# Altium PCB PCB1.1.PcbDoc
Units mil, origin at the board's own origin, x right, y up, seen from the top; angles counter-clockwise.
Board outline 2362.2 x 2362.2 mil, 2 copper layers (Top Layer, Bottom Layer); 150 components, 103 nets, 538 pads, 1 vias.
Unrouted connection lines stored in the file: 224.
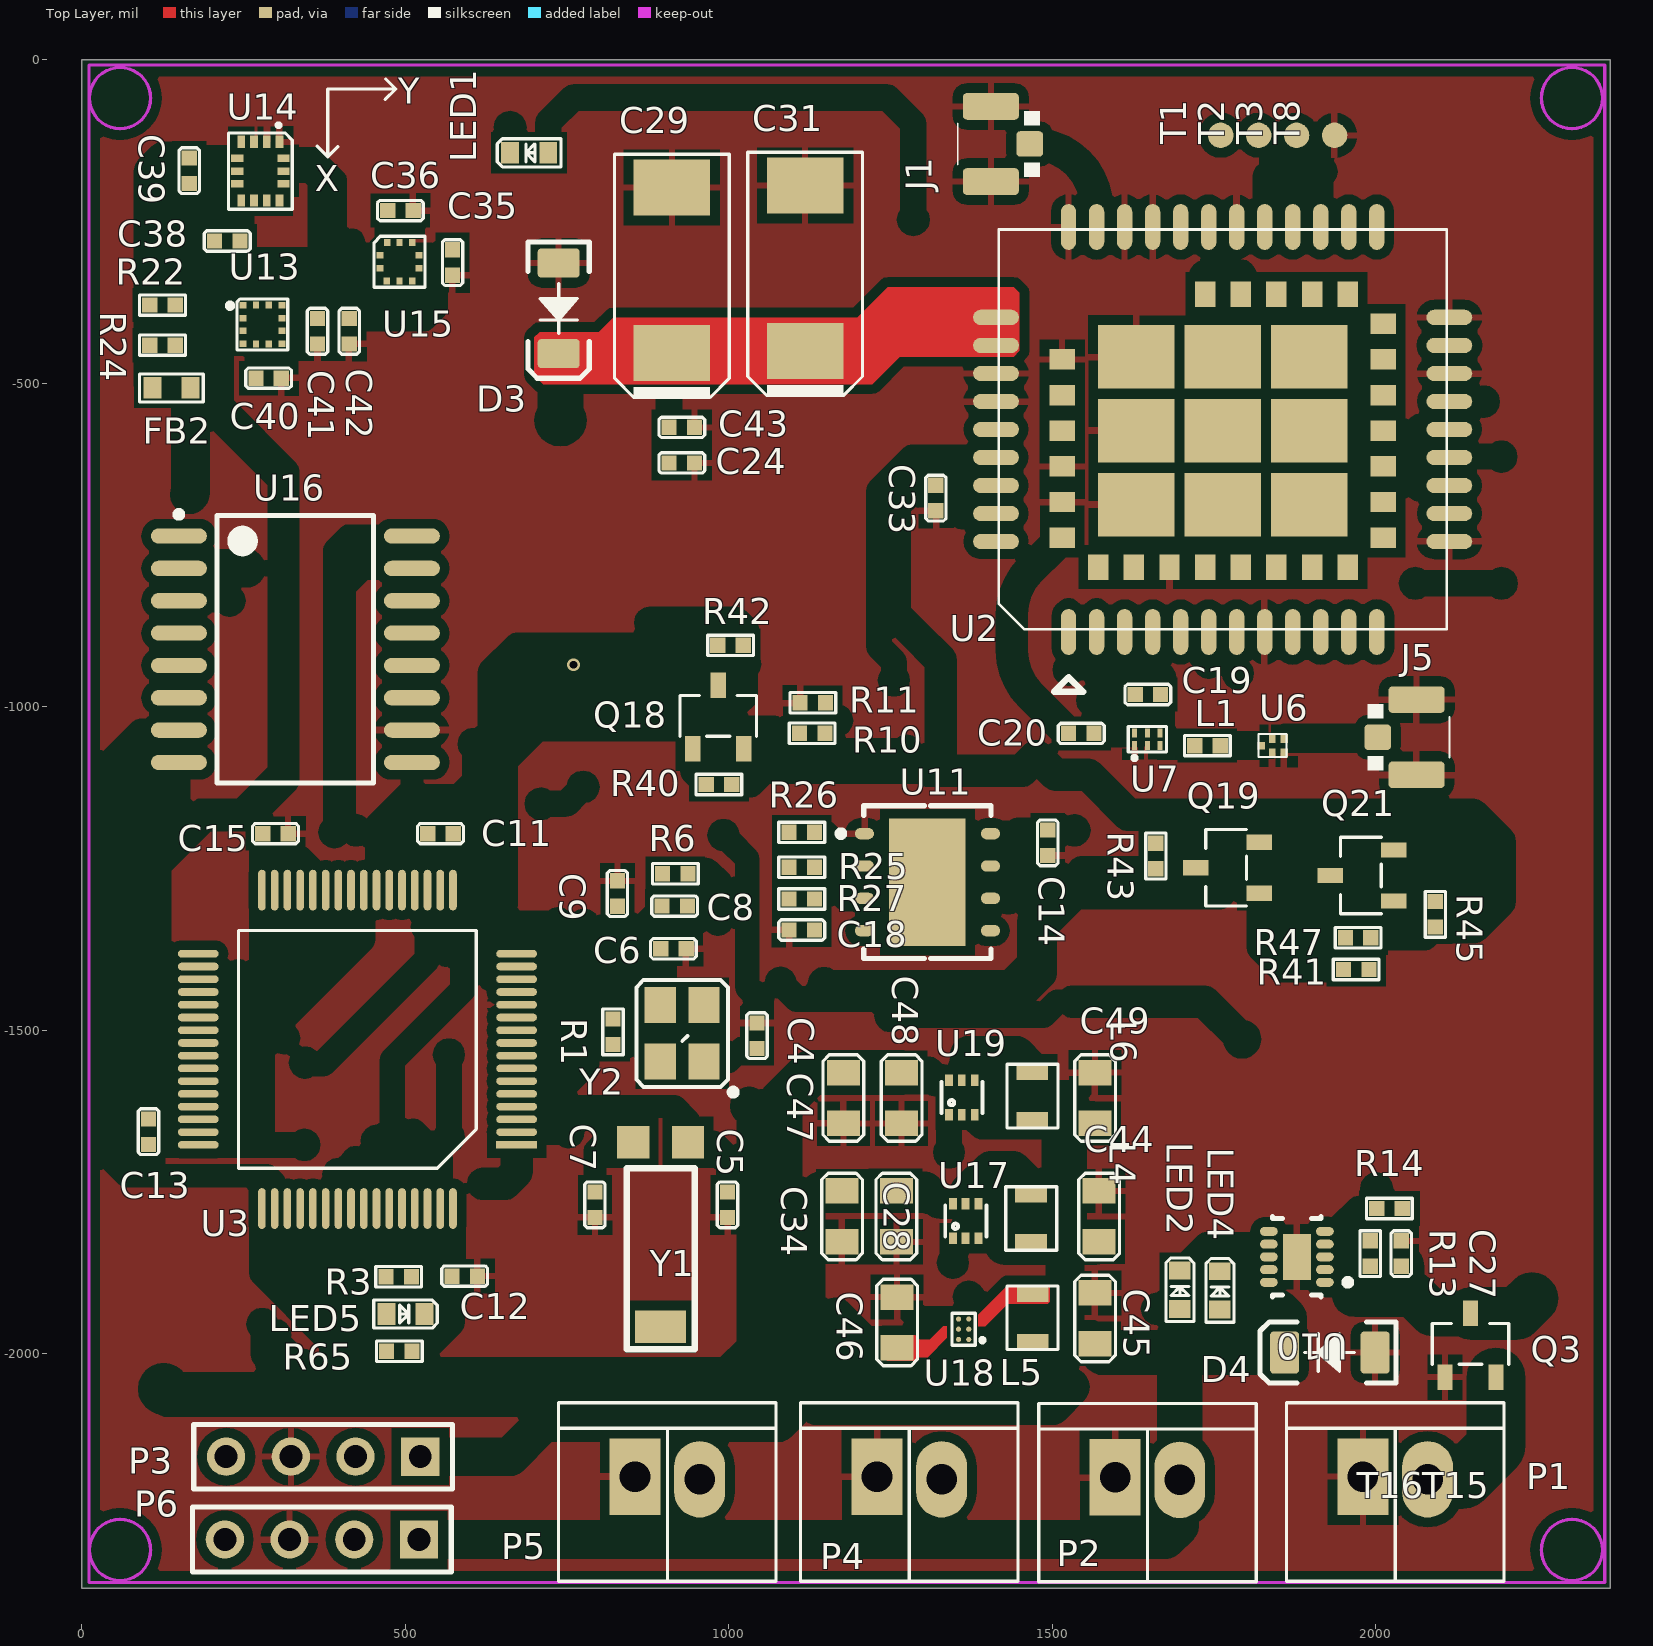
[diagram p0: Top Layer view]
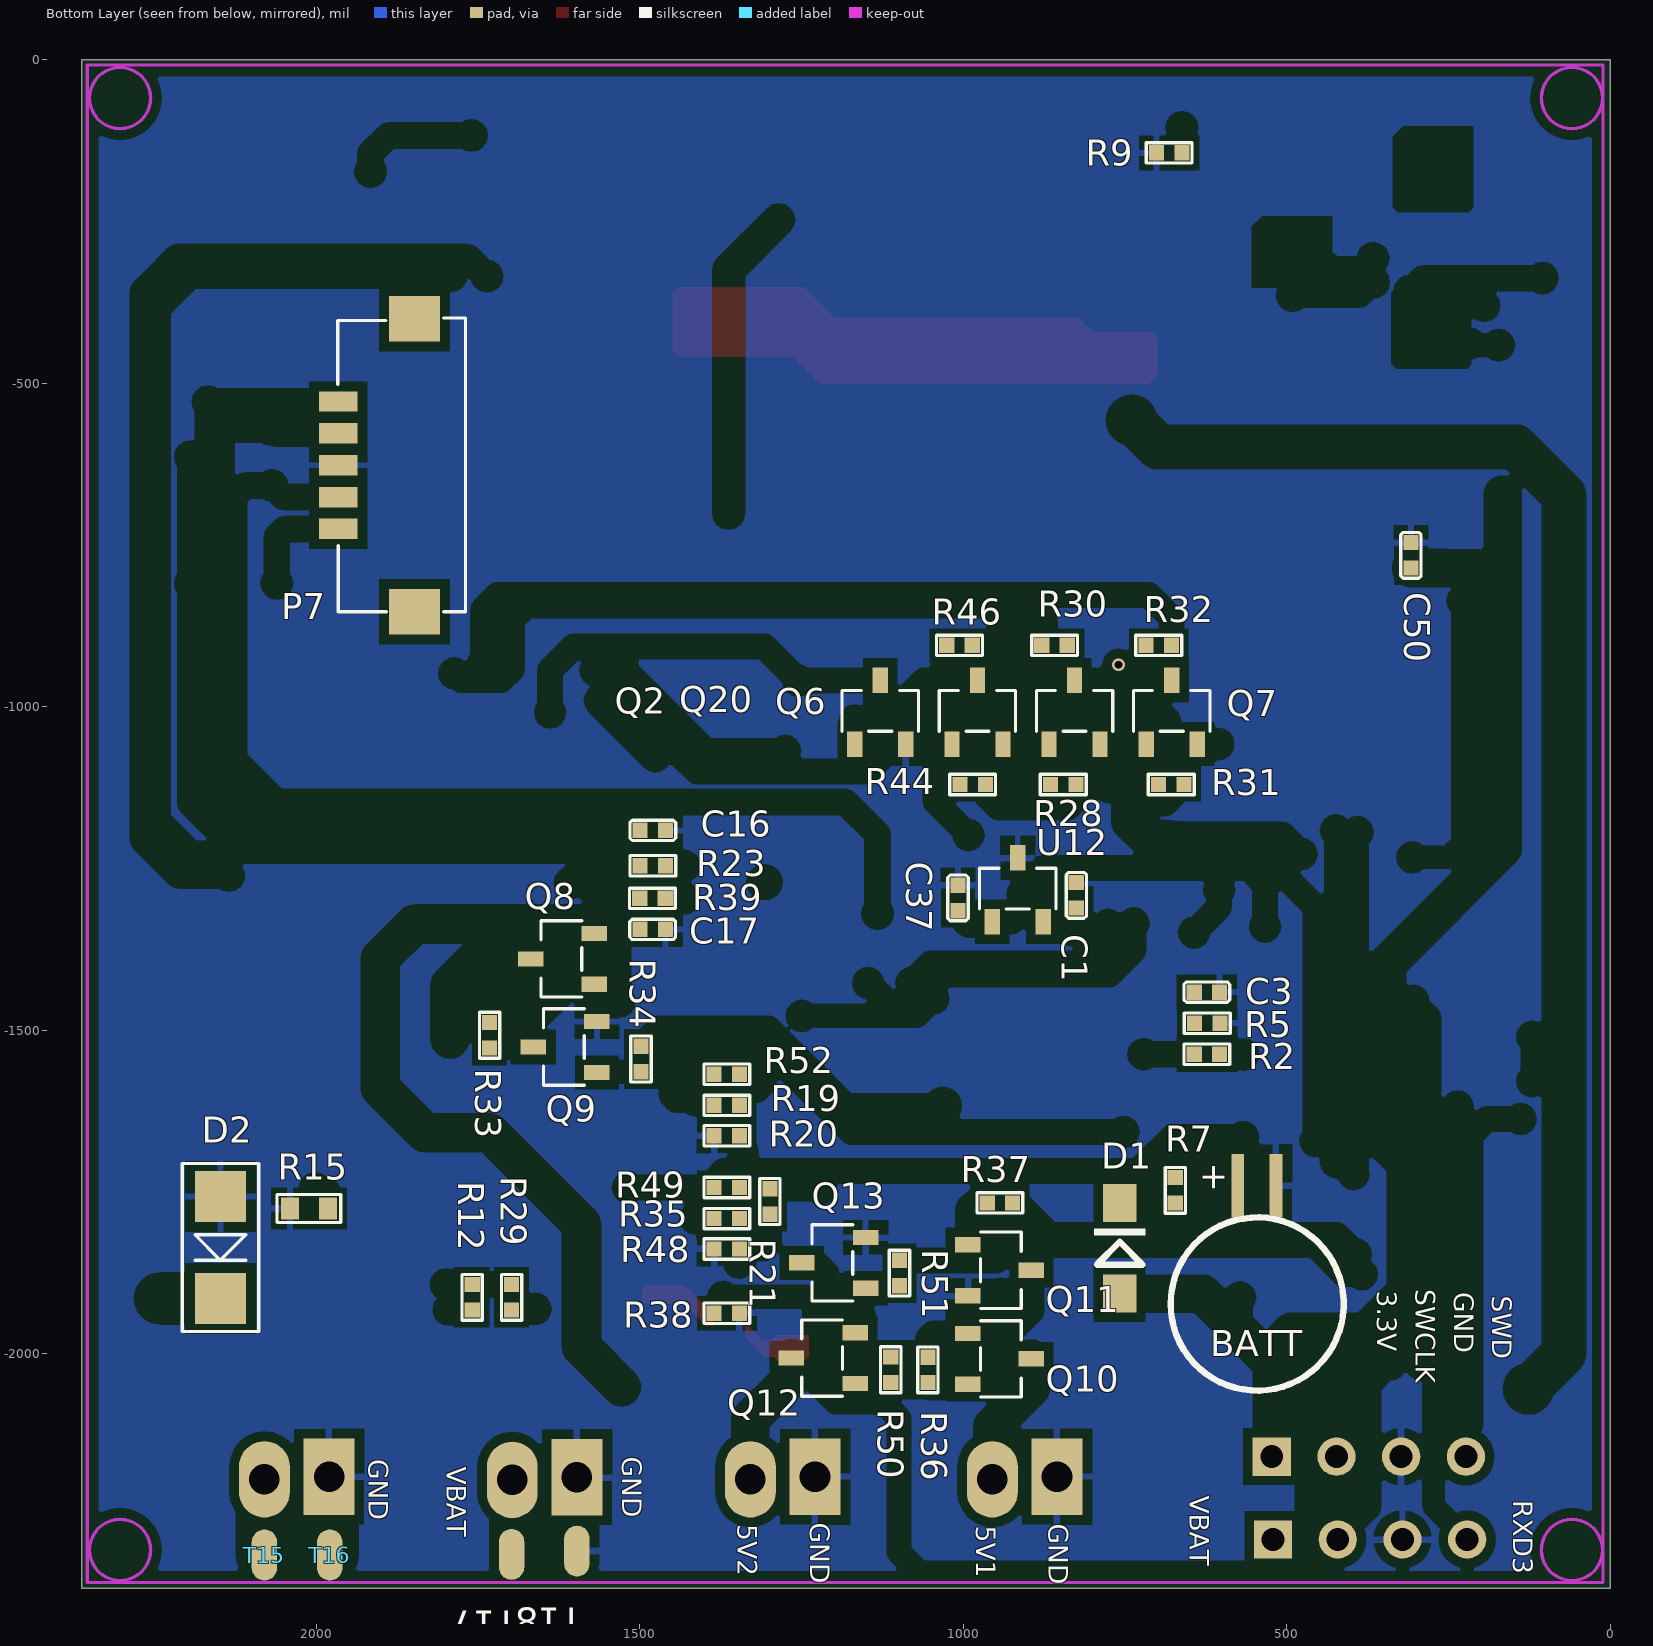
[diagram p1: Bottom Layer view, seen from below]

## Layer stack, top to bottom
Top Layer: signal copper 1.4
Dielectric: dielectric 12.6, FR-4, Dk 4.8
Bottom Layer: signal copper 1.4

## Board outline
0,-2362.2 0,0 2362.2,0 2362.2,-2362.2

## Design rules (kind name [scope] priority, off if disabled: settings)
Clearance [InPolygon  And InNet(AGND)] p1: gap=15
Clearance Clearance_1 [All] p2: gap=5
HoleToHoleClearance [All] p1: gap=5 allowstackedmicrovias=TRUE
MinimumSolderMaskSliver [All] p1: minsoldermaskwidth=1
PolygonConnect PolygonConnect_1 [IsVia  And InNet(AGND)] p1: connectstyle=Direct reliefconductorwidth=10 reliefentries=4 polygonreliefangle="90 Angle"
PolygonConnect [All] p2: connectstyle=Relief reliefconductorwidth=10 reliefentries=4 polygonreliefangle="90 Angle"
RoutingVias [All] p1: holewidth=28 width=50 viastyle="Through Hole" minholewidth=28 minwidth=50 maxholewidth=28 maxwidth=50
SilkToSilkClearance [All] p1: silktosilkclearance=5
SilkscreenOverComponentPads [All] p1: minsilkscreentomaskgap=1
SolderMaskExpansion [All] p1: expansion=4
Width [All] p1: maxlimit=200 minlimit=5 preferedwidth=10
24 further rules are at their usual default settings.

## Classes and differential pairs
component class sensors: C35 C36 C38 C39 C40 C41 C42 FB2 R22 R24 U13 U14 U15
component class power: C1 C27 C28 C34 C37 C44 C45 C46 C47 C48 C49 D2 D4 L4 L5 L6 LED2 LED4 P1 P2 P4 P5 Q3 Q8 Q9 Q10 Q11 Q12 Q13 R12 R13 R14 R15 R19 R20 R21 R29 R33 R34 R35 R36 R37 R38 R48 R49 R50 R51 R52 T15 T16 T17 T18 U10 U12 U17 U18 U19
component class GPS&&lte2: C10 C14 C16 C17 C18 C19 C20 C21 C24 C26 C29 C30 C31 C33 C43 D3 J1 J5 L1 LED1 P7 Q2 Q6 Q7 Q18 Q19 Q20 Q21 R8 R9 R10 R11 R17 R23 R25 R26 R27 R28 R30 R31 R32 R39 R40 R41 R42 R43 R44 R45 R46 R47 T1 T2 T3 T8 U6 U7 U11
component class CPU: BATT C3 C4 C5 C6 C7 C8 C9 C11 C12 C13 C15 C50 D1 LED5 P3 P6 R1 R2 R3 R5 R6 R7 R65 U3 U16 U? Y1 Y2
component class NBIOT: U2

## Components (designator, comment, footprint, x,y, rotation, side; value= is the part's Value field where it differs from the comment)
BATT "MS621FE" MS621FE 546,-1740 r90 bottom
C1 "0.1uF/25V" 0402c 825,-1311 r90 bottom
C3 "0.1uF/25v" 0402c 643,-1441 r180 bottom
C4 "22pF" 0402c 1043.62,-1488.58 r270 top
C5 "6pF" 0402c 998,-1750 r270 top
C6 "22pF" 0402c 934,-1374 r180 top
C7 "6pF" 0402c 793,-1750 r270 top
C8 "0.1uF/25V" 0402C 936,-1308 r180 top
C9 "0.1uF/25V" 0402C 827.76,-1268.82 r270 top
C11 "0.1uF/25V" 0402C 574,-1196 r180 top
C12 "0.1uF/25V" 0402C 611.42,-1879.96 r180 top
C13 "0.1uF/25V" 0402C 103,-1637 r270 top
C14 "0.1uF" 0402C 1493,-1229.88 r90 top
C15 "0.1uF/25V" 0402C 319,-1196 r180 top
C16 "10pF/NC" 0402C 1460,-1190.88 r0 bottom
C17 "10pF/NC" 0402C 1460.24,-1344 r0 bottom
C18 "10pF/NC" 0402C 1093,-1345 r0 top
C19 "0.1uF" 0402C 1628,-981 r0 top
C20 "36pF" 0402c 1525,-1041 r0 top
C24 "10pF" 0402C 947,-623 r180 top
C27 "1uF/25V" 0402C 2039.37,-1864.76 r90 top
C28 "22uF/10V" 0805C 1259,-1748.31 r270 top
C29 "1000uF" 7343 912,-453 r90 top
C31 "1000uF" 7343 1118,-450 r90 top
C33 "0.1uF" 0402C 1320,-697 r90 top
C34 "22uF/10V" 0805C 1175,-1748.31 r270 top
C35 "0.1uF/25V" 0402C 573,-333 r90 top
C36 "0.1uF/25V" 0402C 512,-233 r180 top
C37 "0.1uF/25V" 0402c 1008,-1315 r90 bottom
C38 "0.1uF/25V" 0402C 205,-280 r0 top
C39 "0.1uF/25V" 0402C 166,-191 r90 top
C40 "22pF" 0402c 269,-492 r0 top
C41 "0.1uF/25V" 0402C 364.25,-439.19 r90 top
C42 "0.1uF/25V" 0402C 413.25,-439.19 r90 top
C43 "33pF" 0402C 947,-568 r180 top
C44 "22uF/10V" 0805C 1572.42,-1827.05 r90 top
C45 "22uF/10V" 0805C 1566,-1984.74 r90 top
C46 "22uF/10V" 0805C 1260,-1991 r90 top
C47 "22uF/10V" 0805C 1177,-1565.26 r270 top
C48 "22uF/10V" 0805C 1267,-1565.26 r270 top
C49 "22uF/10V" 0805C 1566,-1644 r90 top
C50 "0.1uF/25V" 0402C 307.93,-746.08 r270 bottom
D1 "1N4148" DIODE_SOP 758,-1907 r90 bottom
D2 "SMAJ12CA" SMA 2148,-1757 r270 bottom
D3 "DIODE_SCHOTTKY_0" LL-34(D1206) 737,-384 r270 top
D4 "DIODE_SCHOTTKY_0" LL-34(D1206) 1929,-1998 r180 top
FB2 "10R/1A" 0603R 168,-507 r180 top
J1 "IPEX" RF-UFL 1405,-130 r90 top
J5 "IPEX" RF-UFL 2063,-1047 r270 top
L1 "LQW15A" 0402R 1720,-1060 r0 top
L4 "SRP4020TA-1R0M" L2520 1466.99,-1753.05 r270 top
L5 "SRP4020TA-2R2M" L2520 1469.74,-1982 r90 top
L6 "SRP4020TA-1R0M" L2520 1469,-1564 r270 top
LED1 "LED" 0603LED 720.94,-143.75 r180 top
LED2 "LED" 0603LED 1697.2,-1930.51 r90 top
LED4 "LED" 0603LED 1759,-1931.4 r90 top
LED5 "LED" 0603LED 470.67,-1938.58 r0 top
P1 "Header 2" 2X2.54MMZ 1980,-2190 r0 top
P2 "Header 2" 2X2.54MMZ 1597,-2191 r0 top
P3 "Header 4" HDR1X4 523,-2159 r180 top
P4 "Header 2" 2X2.54MMZ 1229,-2190 r0 top
P5 "Header 2" 2X2.54MMZ 855,-2190 r0 top
P6 "Header 4" HDR1X4 521,-2287 r180 top
P7 "Header 5" 5×1.25mmSMT 1966,-725 r90 bottom
Q2 "MMBT3904" SOT23-3 1167.5,-1057.51 r270 bottom
Q3 "Si2369DS" sot23-3 2107,-2036 r270 top
Q6 "MMBT3904" SOT23-3 867.17,-1057.51 r270 bottom
Q7 "MMBT3904" SOT23-3 717,-1057.51 r270 bottom
Q8 "Si2369DS" sot23-3 1570,-1429 r180 bottom
Q9 "S8050" SOT23-3 1566,-1565.26 r180 bottom
Q10 "Si2369DS" sot23-3 992.87,-1968.46 r0 bottom
Q11 "S8050" SOT23-3 992.87,-1831.57 r0 bottom
Q12 "Si2369DS" sot23-3 1167,-2046 r180 bottom
Q13 "S8050" SOT23-3 1150.83,-1898.82 r180 bottom
Q18 "MMBT3904" SOT23-3 944.26,-1065 r270 top
Q19 "MMBT3904" SOT23-3 1820,-1288 r0 top
Q20 "MMBT3904" SOT23-3 1017.33,-1057.51 r270 bottom
Q21 "MMBT3904" SOT23-3 2028,-1300 r0 top
R1 "1MR" 0402R 821,-1522 r90 top
R2 "10K/1%" 0402R 603.63,-1537 r0 bottom
R3 "100K" 0402R 470,-1881 r0 top
R5 "10K/1%" 0402R 642.37,-1489 r180 bottom
R6 "10K" 0402R 937,-1258 r180 top
R7 "470" 0402R 672,-1767 r90 bottom
R9 "1K" 0402R 661.88,-143.75 r0 bottom
R10 "4.7K" 0402R 1148.51,-1040.78 r180 top
R11 "47K" 0402R 1149.51,-993.78 r180 top
R12 "1K/1%" 0402R 1759,-1893 r270 bottom
R13 "3.95K/1%" 0402R 1991.37,-1864.76 r90 top
R14 "21.5k/1%" 0402R 2001.37,-1775.39 r0 top
R15 "RTH103AT" 0603R 2040.74,-1775.39 r180 bottom
R19 "534K/1%" 0402R 1385,-1616 r180 bottom
R20 "100K/1%" 0402R 1385,-1663 r180 bottom
R21 "400K/1%" 0402R 1298.74,-1744.92 r270 bottom
R22 "4.7K" 0402R 105.01,-379 r0 top
R23 "10R" 0402R 1499.37,-1245.63 r180 bottom
R24 "4.7K" 0402R 144.38,-441 r180 top
R25 "0R" 0402R 1132.41,-1248 r180 top
R26 "0R" 0402R 1132.41,-1194 r180 top
R27 "10R" 0402R 1132.41,-1297 r180 top
R28 "4.7K" 0402R 865,-1120 r180 bottom
R29 "1K/1%" 0402R 1698,-1893 r270 bottom
R30 "10K" 0402R 839,-905 r0 bottom
R31 "4.7K" 0402R 698,-1120 r180 bottom
R32 "4.7K" 0402R 678,-905 r0 bottom
R33 "4K7" 0402R 1732,-1488 r270 bottom
R34 "4K7" 0402R 1498,-1564 r90 bottom
R35 "10K/1%" 0402R 1385,-1791 r180 bottom
R36 "4K7" 0402R 1054.45,-2044.49 r90 bottom
R37 "4K7" 0402R 962.95,-1766.81 r180 bottom
R38 "10K/1%" 0402R 1345.63,-1937.28 r0 bottom
R39 "10R" 0402R 1500,-1296 r180 bottom
R40 "4.7K" 0402R 965,-1120 r0 top
R41 "4.7K" 0402R 1950,-1406 r0 top
R42 "10K" 0402R 983,-905 r0 top
R43 "10K" 0402R 1660,-1250.31 r90 top
R44 "4.7K" 0402R 1005,-1120 r180 bottom
R45 "4.7K" 0402R 2092,-1301 r270 top
R46 "4.7K" 0402R 986,-905 r0 bottom
R47 "4.7K" 0402R 1953,-1357 r0 top
R48 "100K/1%" 0402R 1385,-1838 r180 bottom
R49 "13K/1%" 0402R 1385,-1743 r180 bottom
R50 "4K7" 0402R 1112,-2005 r270 bottom
R51 "4K7" 0402R 1098.46,-1894.92 r90 bottom
R52 "10K/1%" 0402R 1385,-1568 r180 bottom
R65 "1K" 0402R 471,-1996 r0 top
T1 "TPD" TPD 1760.27,-116.69 r90 top
T2 "TPD" TPD 1818.94,-116.69 r90 top
T3 "TPD" TPD 1877.6,-116.69 r90 top
T8 "TPD" TPD 1936.27,-116.69 r90 top
T15 "TPD" TP#1 2080,-2311 r90 top
T16 "TPD" TP#1 1979,-2311 r90 top
T17 "TPD" TP#2 1698,-2310 r270 bottom
T18 "TPD" TP#2 1597,-2305 r270 bottom
U2 "SIM7080G" SIM868 1525.16,-884.25 r90 top
U3 "stm32l412r8t6" LQFP-64 672,-1677 r180 top
U6 "SAFFB1G56KB0F0A" SAFFB1G56KB0F0A 1823,-1060 r0 top
U7 "AW5005DNR" AW5005 1647,-1050 r90 top
U10 "bq24210" QFN50P200X300X80-10N 1878,-1850.19 r180 top
U11 "SLI76CF3600P" QFN127P500X600X80-8N 1307,-1271 r0 top
U12 "REF3025AIDBZR" SOT23-3 955,-1332 r270 bottom
U13 "LIS2MDL" LIS2MDL 279,-409 r0 top
U14 "LSM6DS3TR" LSM6DS3TR-C 276,-172 r270 top
U15 "BMP388" BMP388 491,-312 r90 top
U16 "MX25L51245GMI-10G" SOP127P1030X239-16N 330,-911 r0 top
U17 "TPS61023" SOT563-6 1366,-1795 r0 top
U18 "TPS610997YFFR" TPS610997YFFR 1363,-1962 r180 top
U19 "TPS61023" SOT563-6 1360,-1604 r0 top
Y1 "MC-146 32.768K/6pF" 32.768K 852,-1673 r0 top
Y2 "8MHz" OSCILLATOR-3.2X2.5 928,-1505 r90 top

## Footprints (in the part's own frame and the unit in brackets; to place one, negate y for a bottom-side part, rotate by r counter-clockwise, add the part's x,y. Pads: shape width x height; smd on the part's side, far side on the other; paste and mask are expansions set on the pad)
2X2.54MMZ [mm]
  rect 2x3 hole 1.2: 1(0,0)
  oval 2x3 hole 1.2: 2(2.54,-0.1)
  silkscreen extent -3,-4.1 5.54,2.9
5×1.25mmSMT [mm]
  rect 1.8x2 smd: 0(-3.25,-3) 0(8.25,-3)
  rect 0.8x1.5 smd: 1(0,0) 2(1.25,0) 3(2.5,0) 4(3.75,0) 5(5,0)
  round 0.5 on Bottom Overlay: ""(-0.875,0.432)
  silkscreen extent -3.25,-5 8.28,0.02
32.768K [mil]
  rect 50x50 smd: 1(0,0) 2(85,0)
  rect 78.74x50 smd: 3(42.13,-285)
  silkscreen extent -10,-320 95,-40
0402c [mm]
  rect 0.6x0.6 smd: 1(0,0) 2(1,0)
  silkscreen extent -0.4,-0.4 1.4,0.4
0402C [mm]
  rect 0.6x0.6 smd: 1(0,0) 2(1,0)
  silkscreen extent -0.4,-0.4 1.4,0.4
0402R [mm]
  rect 0.6x0.6 smd: 1(0,0) 2(1,0)
  silkscreen extent -0.4,-0.4 1.4,0.4
0603LED [mm]
  rect 0.7x0.85 smd: 1(0,0) 2(1.5,0)
  silkscreen extent -0.5,-0.55 2,0.55
0603R [mm]
  rect 0.7x0.85 smd: 1(0,0) 2(1.5,0)
  silkscreen extent -0.5,-0.55 2,0.55
0805C [mm]
  rect 1x1.3 smd: 1(0,0) 2(2,0)
  silkscreen extent -0.7,-0.8 2.7,0.8
7343 [mm]
  rect 2.2x3 smd: 1(0,0) 2(6.5,0)
  silkscreen extent -1.75,-2.25 7.8,2.25
AW5005 [mm]
  rect 0.35x0.2 smd: 1(-0.25,0.5) 2(-0.25,0) 3(-0.25,-0.5) 4(0.25,-0.5) 5(0.25,0) 6(0.25,0.5)
  silkscreen extent -0.77,-0.75 0.5,0.75
BMP388 [mm]
  rect 0.25x0.275 smd: 1(0.25,0.763) 2(-0.25,0.763) 6(-0.25,-0.763) 7(0.25,-0.763)
  rect 0.275x0.25 smd: 3(-0.763,0.5) 4(-0.763,0) 5(-0.763,-0.5) 8(0.763,-0.5) 9(0.763,0) 10(0.763,0.483)
  silkscreen extent -1,-1 1,1
DIODE_SOP [mm]
  rect 1.5x1.3 smd: 1(0,0) 2(3.556,0)
  silkscreen extent 1.14,-1.02 2.56,1.02
HDR1X4 [mm] "Connector; Header; 4 Position"
  rect 1.5x1.5 hole 0.9: 1(0,0)
  round 1.5 hole 0.9: 2(2.54,0) 3(5.08,0) 4(7.62,0)
  silkscreen extent -1.27,-1.27 8.89,1.27
L2520 [mm]
  rect 0.65x1.25 smd: 1(0,0) 2(1.9,0)
  silkscreen extent -0.29,-0.99 2.21,1.01
LIS2MDL [mm]
  rect 0.275x0.25 smd: 1(-0.763,0.75) 2(-0.763,0.25) 3(-0.763,-0.25) 4(-0.763,-0.75) 7(0.763,-0.75) 8(0.763,-0.25) 9(0.763,0.25) 10(0.763,0.75)
  rect 0.25x0.275 smd: 5(-0.25,-0.763) 6(0.25,-0.763) 11(0.25,0.763) 12(-0.25,0.763)
  silkscreen extent -1.35,-1 1,1
LL-34(D1206) [mil]
  rrect25% 45x65 smd: 1(-70,0) 2(70,0)
  silkscreen extent -102,-47 108,47, body extent -70,-28 68,30, height 56
LQFP-64 [mm]
  rect 1.6x0.3 smd: 1(0,0)
  oval 1.6x0.3 smd: 2(0,-0.5) 3(0,-1) 4(0,-1.5) 5(0,-2) 6(0,-2.5) 7(0,-3) 8(0,-3.5) 9(0,-4) 10(0,-4.5) 11(0,-5) 12(0,-5.5) 13(0,-6) 14(0,-6.5) 15(0,-7) 16(0,-7.5) 33(12.5,-7.5) 34(12.5,-7) 35(12.5,-6.5) 36(12.5,-6) 37(12.5,-5.5) 38(12.5,-5) 39(12.5,-4.5) 40(12.5,-4) 41(12.5,-3.5) 42(12.5,-3) 43(12.5,-2.5) 44(12.5,-2) 45(12.5,-1.5) 46(12.5,-1) 47(12.5,-0.5) 48(12.5,0)
  oval 0.3x1.6 smd: 17(2.5,-10) 18(3,-10) 19(3.5,-10) 20(4,-10) 21(4.5,-10) 22(5,-10) 23(5.5,-10) 24(6,-10) 25(6.5,-10) 26(7,-10) 27(7.5,-10) 28(8,-10) 29(8.5,-10) 30(9,-10) 31(9.5,-10) 32(10,-10) 49(10,2.5) 50(9.5,2.5) 51(9,2.5) 52(8.5,2.5) 53(8,2.5) 54(7.5,2.5) 55(7,2.5) 56(6.5,2.5) 57(6,2.5) 58(5.5,2.5) 59(5,2.5) 60(4.5,2.5) 61(4,2.5) 62(3.5,2.5) 63(3,2.5) 64(2.5,2.5)
  silkscreen extent 1.59,-8.41 10.91,0.91
LSM6DS3TR-C [mm]
  rect 0.48x0.3 smd: 1(-1.15,0.75) 2(-1.15,0.25) 3(-1.15,-0.25) 4(-1.15,-0.75) 8(1.15,-0.75) 9(1.15,-0.25) 10(1.15,0.25) 11(1.15,0.75)
  rect 0.3x0.48 smd: 5(-0.5,-0.91) 6(0,-0.91) 7(0.5,-0.91) 12(0.5,0.91) 13(0,0.91) 14(-0.5,0.91)
  silkscreen extent -1.83,-1.25 1.5,1.25
MS621FE [mm]
  rect 2.5x0.5 smd: 1(0,-0.749) 2(0,0.749)
  silkscreen extent -8.05,-3.41 -1.25,3.39
OSCILLATOR-3.2X2.5 [mil] "OSCILLATOR-3.2X2.5"
  rect 56x48 smd: 1(-43.31,-33.46) 2(44,-33.46) 3(44,34) 4(-43.31,34)
  silkscreen extent -95,-83 83,71
QFN50P200X300X80-10N [mm] "QFN, 10-Leads, Body 2.9x1.9mm (max), Pitch 0.50mm, IPC Medium Density"
  oval 0.7x0.35 smd: 1(-1.1,1) 2(-1.1,0.5) 3(-1.1,0) 4(-1.1,-0.5) 5(-1.1,-1) 6(1.1,-1) 7(1.1,-0.5) 8(1.1,0) 9(1.1,0.5) 10(1.1,1)
  rect 1.1x1.8 smd: 11(0,0)
  silkscreen extent -2.13,-1.58 0.95,1.57, body extent -0.95,-1.45 0.95,1.45, height 0.8
QFN127P500X600X80-8N [mm] "QFN, 8-Leads, Body 6.0x5.0mm (max), Pitch 1.27mm, IPC Medium Density"
  oval 0.75x0.45 smd: 1(-2.475,1.905) 2(-2.475,0.635) 3(-2.475,-0.635) 4(-2.475,-1.905) 5(2.475,-1.905) 6(2.475,-0.635) 7(2.475,0.635) 8(2.475,1.905)
  rect 3x5 smd: 9(0,0)
  silkscreen extent -3.52,-3 2.5,3
RF-UFL [mm]
  rrect30% 1x1.05 smd: 1(0,-1.525)
  rrect30% 1.05x2.2 smd: 2(-1.475,0) 2(1.475,0)
  silkscreen extent -1.3,-1.93 1.3,1.3, body extent -1.7,-1.55 1.7,1.55, height 1.25
SAFFB1G56KB0F0A [mm]
  rect 0.3x0.3 smd: 1(0,0)
  rect 0.25x0.35 smd: 2(0.425,-0.288) 5(0.425,0.288)
  rect 0.3x0.35 smd: 3(0.9,-0.288) 4(0.9,0.288)
  silkscreen extent -0.1,-0.44 1,0.46
SIM868 [mm]
  oval 1.8x0.6 smd: 1(0,0) 2(0,-1.1) 3(0,-2.2) 4(0,-3.3) 5(0,-4.4) 6(0,-5.5) 7(0,-6.6) 8(0,-7.7) 9(0,-8.8) 10(0,-9.9) 11(0,-11) 12(0,-12.1) 22(15.9,-12.1) 23(15.9,-11) 24(15.9,-9.9) 25(15.9,-8.8) 26(15.9,-7.7) 27(15.9,-6.6) 28(15.9,-5.5) 29(15.9,-4.4) 30(15.9,-3.3) 31(15.9,-2.2) 32(15.9,-1.1) 33(15.9,0)
  oval 0.6x1.8 smd: 13(3.55,-14.95) 14(4.65,-14.95) 15(5.75,-14.95) 16(6.85,-14.95) 17(7.95,-14.95) 18(9.05,-14.95) 19(10.15,-14.95) 20(11.25,-14.95) 21(12.35,-14.95) 34(12.35,2.85) 35(11.25,2.85) 36(10.15,2.85) 37(9.05,2.85) 38(7.95,2.85) 39(6.85,2.85) 40(5.75,2.85) 41(4.65,2.85) 42(3.55,2.85)
  rect 1x0.8 smd: 43(2.549,-1.159) 44(2.549,-2.559) 45(2.549,-3.959) 46(2.549,-5.359) 47(2.549,-6.759) 48(2.549,-8.159) 49(2.549,-9.559) 50(2.549,-10.959) 58(13.251,-10.959) 59(13.251,-9.559) 60(13.251,-8.159) 61(13.251,-6.759) 62(13.251,-5.359)
  rect 0.8x1 smd: 51(3.7,-12.359) 52(5.1,-12.359) 53(6.5,-12.359) 54(7.9,-12.359) 55(9.3,-12.359) 56(10.7,-12.359) 57(12.1,-12.359) 63(10.7,0.25) 64(9.3,0.25) 65(7.9,0.25) 66(6.5,0.25) 67(5.1,0.25) 68(3.7,0.25)
  rect 2.5x3 smd: 69(5,-2.65) 70(5,-6.05) 71(5,-9.45) 72(7.9,-9.45) 73(10.8,-9.45) 74(10.8,-6.05) 75(10.8,-2.65) 76(7.9,-2.65) 77(7.9,-6.05)
  silkscreen extent -2.35,-14.85 15.8,2.75
SMA [mm]
  rect 2x2 smd: 1(0,0) 2(4,0)
  silkscreen extent -1.3,-1.5 5.3,1.5
SOP127P1030X239-16N [mm] "SOP, 16-Leads, Body 10.5x7.6mm (max), Pitch 1.27mm, IPC Medium Density"
  oval 2.2x0.6 smd: 1(-4.575,4.445) 2(-4.575,3.175) 3(-4.575,1.905) 4(-4.575,0.635) 5(-4.575,-0.635) 6(-4.575,-1.905) 7(-4.575,-3.175) 8(-4.575,-4.445) 9(4.575,-4.445) 10(4.575,-3.175) 11(4.575,-1.905) 12(4.575,-0.635) 13(4.575,0.635) 14(4.575,1.905) 15(4.575,3.175) 16(4.575,4.445)
  silkscreen extent -4.7,-5.25 3.08,5.42, body extent -3.8,-5.25 3.8,5.25, height 2.39
SOT23-3 [mm]
  rect 1x0.6 smd: 1(0,0) 2(0,2) 3(-2.5,1)
  silkscreen extent -2.1,-0.5 -0.5,2.5
sot23-3 [mm]
  rect 1x0.6 smd: 1(0,0) 2(0,2) 3(-2.5,1)
  silkscreen extent -2.1,-0.5 -0.5,2.5
SOT563-6 [mil] "SOT563-6"
  rect 12x18 smd: 1(-19.68,-26.57) 2(0,-26.57) 3(20,-26.57) 4(20,27) 5(0,27) 6(-19.68,27)
  silkscreen extent -31,-24 32,24
TP#1 [mm]
  oval 2x1 smd far side: 1(0,0)
TP#2 [mm]
  oval 2x1 smd: 1(0,0)
TPD [mm]
  round 1 smd: 1(0,0)
TPS610997YFFR [mm]
  round 0.2 smd: A1(-0.2,0.4) A2(0.2,0.4) B1(-0.2,0) B2(0.2,0) C1(-0.2,-0.4) C2(0.2,-0.4)
  silkscreen extent -0.77,-0.63 0.46,0.63

## Part data
BATT: library part SBatery
C1 C20 C37: library part Cap, "Capacitor"
C3 C4 C5 C6 C7 C8 C9 C11 C12 C13 C14 C15 C16 C17 C18 C19 C24 C27 C28 C33 C34 C35 C36 C38 C39 C40 C41 C42 C43 C44 C45 C46 C47 C48 C49 C50: library part CAP, "Capacitor"
C29 C31: library part "Cap Pol3", "Polarized Capacitor (Surface Mount)"
D1: library part D
D2: library part DIODE_SCHOTTKY_0
FB2: library part INDUCTOR1
J1 J5: library part ANT
L1 L4 L5 L6: library part INDUCTOR_1
P1 P2 P4 P5: "Header, 2-Pin"
P3 P6: "Header, 4-Pin"
P7: "Header, 5-Pin"
Q2 Q9 Q11 Q13: library part 2N1069_1
Q3 Q8 Q10 Q12: library part NCE4060K, "NMOSFET"
Q6 Q7 Q18 Q19 Q20 Q21: library part NPN
R1: library part Res3, "Resistor"
R2 R5 R9 R10 R11 R12 R13 R14 R15 R19 R20 R21 R22 R23 R24 R25 R26 R27 R28 R29 R30 R31 R32 R33 R34 R35 R36 R37 R38 R39 R40 R41 R42 R43 R44 R45 R46 R47 R48 R49 R50 R51 R52 R65: library part RES1
R3 R6 R7: library part Res2, "Resistor"
U2: library part SIM868E/SIM868
U3: library part STM32L100R8T6, "ARM Cortex-M3 32-bit MCU, 64 KB Flash, 8 KB Internal RAM, 51 I/Os, 64-pin LQFP, -40 to 85 degC, Tray"
U6: library part SAFFB1G56KBOFA
U10: library part bq2410
U12: library part REF3012
Y1 Y2: library part XTAL, "Crystal Oscillator"

## Via types
v1: diameter 20, hole 12, Top Layer to Bottom Layer, tented both sides, 1 vias

## Nets (pads, with @x,y where several pads share a name; then routed paths per layer and width w, separated by ;. In a path a pad name is that pad's centre, name@x,y a point inside that pad or via, vN(x,y) a via of type N, cw(c..) or ccw(c..) an arc to the next point about the centre after c; other vN are vias at no path point)
2.5V: C1.1 C9.2 U3.13 U12.2
AGND: BATT.1 C1.2 C3.2 C4.1 C5.2 C6.1 C7.2 C8.1 C9.1 C11.1 C12.1 C13.1 C14.1 C15.1 C16.1 C17.1 C18.1 C19.1 C24.1 C27.2 C28.2 C29.2 C31.2 C33.1 C34.2 C35.1 C36.1 C37.2 C38.1 C39.1 C40.2 C41.1 C42.1 C43.1 C44.2 C45.2 C46.2 C47.2 C48.2 C49.2 C50.1 D2.1 D3.1 D4.1 J1.2 J5.2 P1.1 P2.1 P3.3 P4.1 P5.1 P6.3 P7.3 Q2.2 Q3.1 Q9.2 Q11.2 Q13.2 R3.2 R5.2 R9.2 R11.2 R13.2 R15.1 R20.1 R35.1 R38.1 R48.1 R52.1 T8.1 T16.1 T18.1 U2.8 U2.13 U2.19 U2.21 U2.27 U2.30 U2.31 U2.33 U2.36 U2.37 U2.45 U2.63 U2.66 U2.67 U2.69 U2.70 U2.71 U2.72 U2.73 U2.74 U2.75 U2.76 U2.77 U3.12 U3.18 U3.31 U3.47 U3.63 U6.2 U6.3 U6.5 U7.1 U7.2 U10.3 U10.11 U11.1 U12.3 U13.6 U13.8 U14.1 U14.2 U14.3 U14.6 U14.7 U15.3 U15.5 U15.8 U15.9 U16.10 U17.4 U18.A2 U18.C2 U19.4 Y2.2 Y2.4
CS: U3.50 U16.7
DM: T2.1 U2.26
DP: T3.1 U2.25
DTR: Q7.3 R32.1 U2.6
EN_3V8: R52.2 U3.2 U19.2
EN_5V: R38.2 U3.45 U18.C1
EN_5V1: R37.2 U3.54
EN_5V2: R51.2 U3.53
GPS_RXD: Q21.3 R47.1 U2.62
GPS_TXD: Q19.2 U2.61
MDTR: Q7.2 U3.21
MISO: U3.44 U16.8
MOSI: U3.57 U16.15
MRI: Q6.3 R30.1 U3.22
NBIOT_GRXD: Q19.3 R43.1 U3.17
NBIOT_GTXD: Q21.2 U3.16
NBIOT_NRXD: Q18.3 R42.1 U3.59
NBIOT_NTXD: Q20.2 U3.58
NET: J1.1 U2.32
NET_LIGHT: LED1.1 U2.41
NetBATT_2: BATT.2 R7.2 U3.1
NetC3_1: C3.1 R2.2 R5.1 U3.8
NetC4_2: C4.2 R1.1 U3.5 Y2.1
NetC5_1: C5.1 U3.4 Y1.2
NetC6_2: C6.2 R1.2 U3.6 Y2.3
NetC7_1: C7.1 U3.3 Y1.1
NetC8_2: C8.2 R6.2 U3.7
NetC20_2: C20.2 U7.6
NetC27_1: C27.1 D2.2 Q3.3 U10.1
NetC40_1: C40.1 U13.5
NetD1_2: D1.2 R7.1
NetJ5_1: J5.1 U6.4
NetL1_1: L1.1 U7.3
NetL1_2: L1.2 U6.1
NetL4_1: L4.1 U17.5
NetL5_2: L5.2 U18.B1
NetL6_1: L6.1 U19.5
NetLED1_2: LED1.2 R9.1
NetLED2_1: LED2.1 R29.2
NetLED2_2: LED2.2 U10.6 U10.7
NetLED4_1: LED4.1 R12.2
NetLED4_2: LED4.2 U10.8
NetLED5_1: LED5.1 R65.1
NetLED5_2: LED5.2 U3.62
NetQ2_1: Q2.1 R10.1 R11.1
NetQ6_1: Q6.1 R28.1
NetQ7_1: Q7.1 R31.1
NetQ8_1: Q8.1 Q9.3 R33.2
NetQ9_1: Q9.1 R34.1
NetQ10_1: Q10.1 Q11.3 R36.2
NetQ11_1: Q11.1 R37.1
NetQ12_1: Q12.1 Q13.3 R50.2
NetQ13_1: Q13.1 R51.1
NetQ18_1: Q18.1 R40.1
NetQ19_1: Q19.1 R41.1
NetQ20_1: Q20.1 R44.1
NetQ21_1: Q21.1 R45.1
NetR3_1: R3.1 U3.60
NetR13_1: R13.1 U10.2
NetR14_1: R14.1 R15.2 U10.5
NetR14_2: R14.2 U10.4
NetR19_2: R19.2 R20.2 U19.1
NetR21_2: R21.2 R48.2 U17.1
NetR23_2: R23.2 U11.7
NetR25_1: R25.1 U11.3
NetR25_2: R25.2 R26.2 R27.2
NetR26_1: R26.1 U11.2
NetR35_2: R35.2 R49.2 U17.2
NetR39_2: R39.2 U11.6
POWER_CTRL_GPS: R34.2 U3.52
PWRKEY: Q2.3 U2.39 U7.5
RF_IN: C20.1 U2.68
RI: Q6.2 U2.7
RXD3: P6.4 U3.25
SCL: R22.2 U3.42 U13.1 U14.13 U15.2
SCLK: U3.55 U16.16
SDA: R24.1 U3.43 U13.4 U14.14 U15.4
SIM_CLK: C17.2 P7.1 R39.1 U2.16
SIM_DATA: C18.2 P7.2 R27.1 U2.15
SIM_PWR: R10.2 U3.14
SIM_RST: C16.2 P7.4 R23.1 U2.17
SIM_RST1: U3.15
SIM_RXD: Q20.3 R46.1 U2.2
SIM_TXD: Q18.2 U2.1
SIM_VDD: C14.2 P7.5 U2.18 U11.8
SPI_RESET: U3.28 U16.3
SWCLK: P3.2 U3.49
SWD: P3.4 U3.46
TXD3: P6.2 U3.24
VBAT: C44.1 C45.1 C49.1 D4.2 L4.2 L5.1 L6.2 P2.2 P6.1 R2.1 R12.1 R29.1 R49.1 T17.1 U10.10 U17.3 U18.A1 U19.3
VBAT_OUT: C24.2 C29.1 C31.1 C43.2 C47.1 C48.1 D3.2 R19.1 U2.34 U2.35 U19.6
VBUS: T1.1 U2.24
VCC_3.3V_S: Q8.3 R30.2 R42.2 R43.2
VCC_3V: C11.2 C12.2 C13.2 C15.2 C28.1 C34.1 C37.1 C50.2 D1.1 FB2.1 P3.1 Q8.2 R6.1 R21.1 R33.1 R65.2 U3.19 U3.32 U3.48 U3.64 U12.1 U16.2 U17.6
VCC_3V_SENSOR: C35.2 C36.2 C38.2 C39.2 C41.2 C42.2 FB2.2 R22.1 R24.2 U13.3 U13.9 U13.10 U14.5 U14.8 U14.12 U15.1 U15.6 U15.10
VCC_5V: C46.1 Q10.2 Q12.2 R36.1 R50.1 U18.B2
VCC_5V1: P5.2 Q10.3
VCC_5V2: P4.2 Q12.3
VCC_IN: P1.2 Q3.2 T15.1
VDD_EXT: C19.2 C33.2 R28.2 R31.2 R32.2 R40.2 R41.2 R44.2 R45.2 R46.2 R47.2 U2.40 U7.4
WP: U3.23 U16.9
pads on no net: P7. P7.0 U2.3 U2.4 U2.5 U2.9 U2.10 U2.11 U2.12 U2.14 U2.20 U2.22 U2.23 U2.28 U2.29 U2.38 U2.42 U2.43 U2.44 U2.46 U2.47 U2.48 U2.49 U2.50 U2.51 U2.52 U2.53 U2.54 U2.55 U2.56 U2.57 U2.58 U2.59 U2.60 U2.64 U2.65 U3.9 U3.10 U3.11 U3.20 U3.26 U3.27 U3.29 U3.30 U3.33 U3.34 U3.35 U3.36 U3.37 U3.38 U3.39 U3.40 U3.41 U3.51 U3.56 U3.61 U10.9 U11.4 U11.5 U11.9 U13.2 U13.7 U13.11 U13.12 U14.4 U14.9 U14.10 U14.11 U15.7 U16.1 U16.4 U16.5 U16.6 U16.11 U16.12 U16.13 U16.14 Y1.3
copper on no net:
  other v1: 760,-935

## Polygon pours and split planes (outlines as drawn)
AGND on Top Layer "Mid-Layer 1-No Net" (solid, remove dead copper): -332,123 2779,123 2779,-2125 2274,-2630 2271,-2633 -286,-2633 -286,-2263 -283,-2260 -222,-2199 -222,160
AGND on Bottom Layer "Mid-Layer 1-No Net" (solid, remove dead copper): -163,60 -156,67 2475,67 2475,-2461 2472,-2464 2437,-2429 -188,-2429 -188,-20 -101,67

## Keep-outs
Keep-Out Layer:
  circle w5: c2303.15,-2303.15 r47.24
  circle w5: c2303.15,-59.06 r47.24
  circle w5: c59.06,-59.06 r47.24
  circle w5: c59.06,-2303.15 r47.24
  lines w5: 10.91,-2353.33 10.91,-8 2354,-8 2354,-2353.33 10.91,-2353.33

## Other copper
Top Layer:
  region net VBAT_OUT: 707.36,-420.71 798.58,-420.71 821.06,-398.23 1198.27,-398.23 1245.39,-351.1 1440.47,-351.1 1449.25,-359.88 1449.25,-449.8 1440.47,-458.58 1264.13,-458.58 1221.61,-501.1 712.89,-501.1 699.45,-487.66 699.45,-428.62
  region net NetL5_2: 1491.85,-1893.78 1431.42,-1893.78 1385.67,-1939.53 1385.67,-1957.72 1396.14,-1957.72 1431.06,-1922.8 1492.99,-1922.8 1496.34,-1919.45 1496.34,-1898.27
  region net VCC_5V: 1238.86,-1971.06 1287.76,-1971.06 1294.76,-1978.07 1310.63,-1978.07 1331.61,-1957.09 1336.78,-1957.09 1336.78,-1975.31 1307.09,-2005 1292.2,-2005 1286.65,-2010.55 1244.96,-2010.55 1238.86,-2004.45
Bottom Layer:
  pour cut-out: 211.73,-102.95 212.01,-102.68 319.88,-102.68 335.71,-118.5 335.71,-227.91 328.27,-235.35 218.27,-235.35 211.73,-228.82
  pour cut-out: 214.43,-344.71 214.7,-344.43 322.57,-344.43 338.4,-360.26 338.4,-469.67 330.96,-477.11 220.96,-477.11 214.43,-470.57
  pour cut-out: 429.76,-241.89 430.04,-241.61 537.91,-241.61 553.74,-257.44 553.74,-352 429.76,-352

## Silkscreen, mask and mechanical layers (free items; w line width, h text height)
Top Overlay:
  lines w5: 363.9,-133.58 380,-149.69 ; 395.37,-134.31 380,-149.69 ; 468.82,-61.1 484.92,-45 ; 469.55,-29.63 484.92,-45 ; 485.16,-45 484.92,-45 ; 380,-149.69 380,-149.92 380,-45 484.92,-45
  text "Y" at 522.24,-68.19 h40
  text "X" at 398.07,-203.23 h40
Bottom Overlay:
  text "SWCLK" at 300.52,-1900.02 h30 r90
  text "3.3V" at 360.13,-1902.35 h30 r90
  text "GND" at 240.91,-1905.18 h30 r90
  text "SWD" at 182.41,-1910.38 h30 r90
  text "GND" at 1527,-2159 h30 r90
  text "GND" at 1919,-2163 h30 r90
  text "VBAT" at 1798.48,-2174.55 h30 r90
  text "VBAT" at 650.06,-2219.32 h30 r90
  text "RXD3" at 149.62,-2226.6 h30 r90
  text "GND" at 1236.28,-2260.81 h30 r90
  text "GND" at 868.05,-2262.39 h30 r90
  text "5V2" at 1348.8,-2263.17 h30 r90
  text "5V1" at 979.46,-2266.09 h30 r90
Mechanical 1:
  circle w5: c59.06,-59.06 r47.24
  circle w5: c59.06,-2303.15 r47.24
  circle w5: c2303.15,-2303.15 r47.24
  circle w5: c2303.15,-59.06 r47.24
  lines w5: 0,-2362.2 2362.2,-2362.2 2362.2,0 0,0 0,-2362.2

## Text inside footprints (layer, text, board x,y; h text height)
BATT: Bottom Overlay "+" at 596,-1750 h40 r270